# Altium PCB Dashboard PCB.PcbDoc
Units mm, origin at the board's own origin, x right, y up, seen from the top; angles counter-clockwise.
Board outline 53.83 x 47.9 mm, 2 copper layers (Top Layer, Bottom Layer); 22 components, 23 nets, 60 pads, 12 vias.
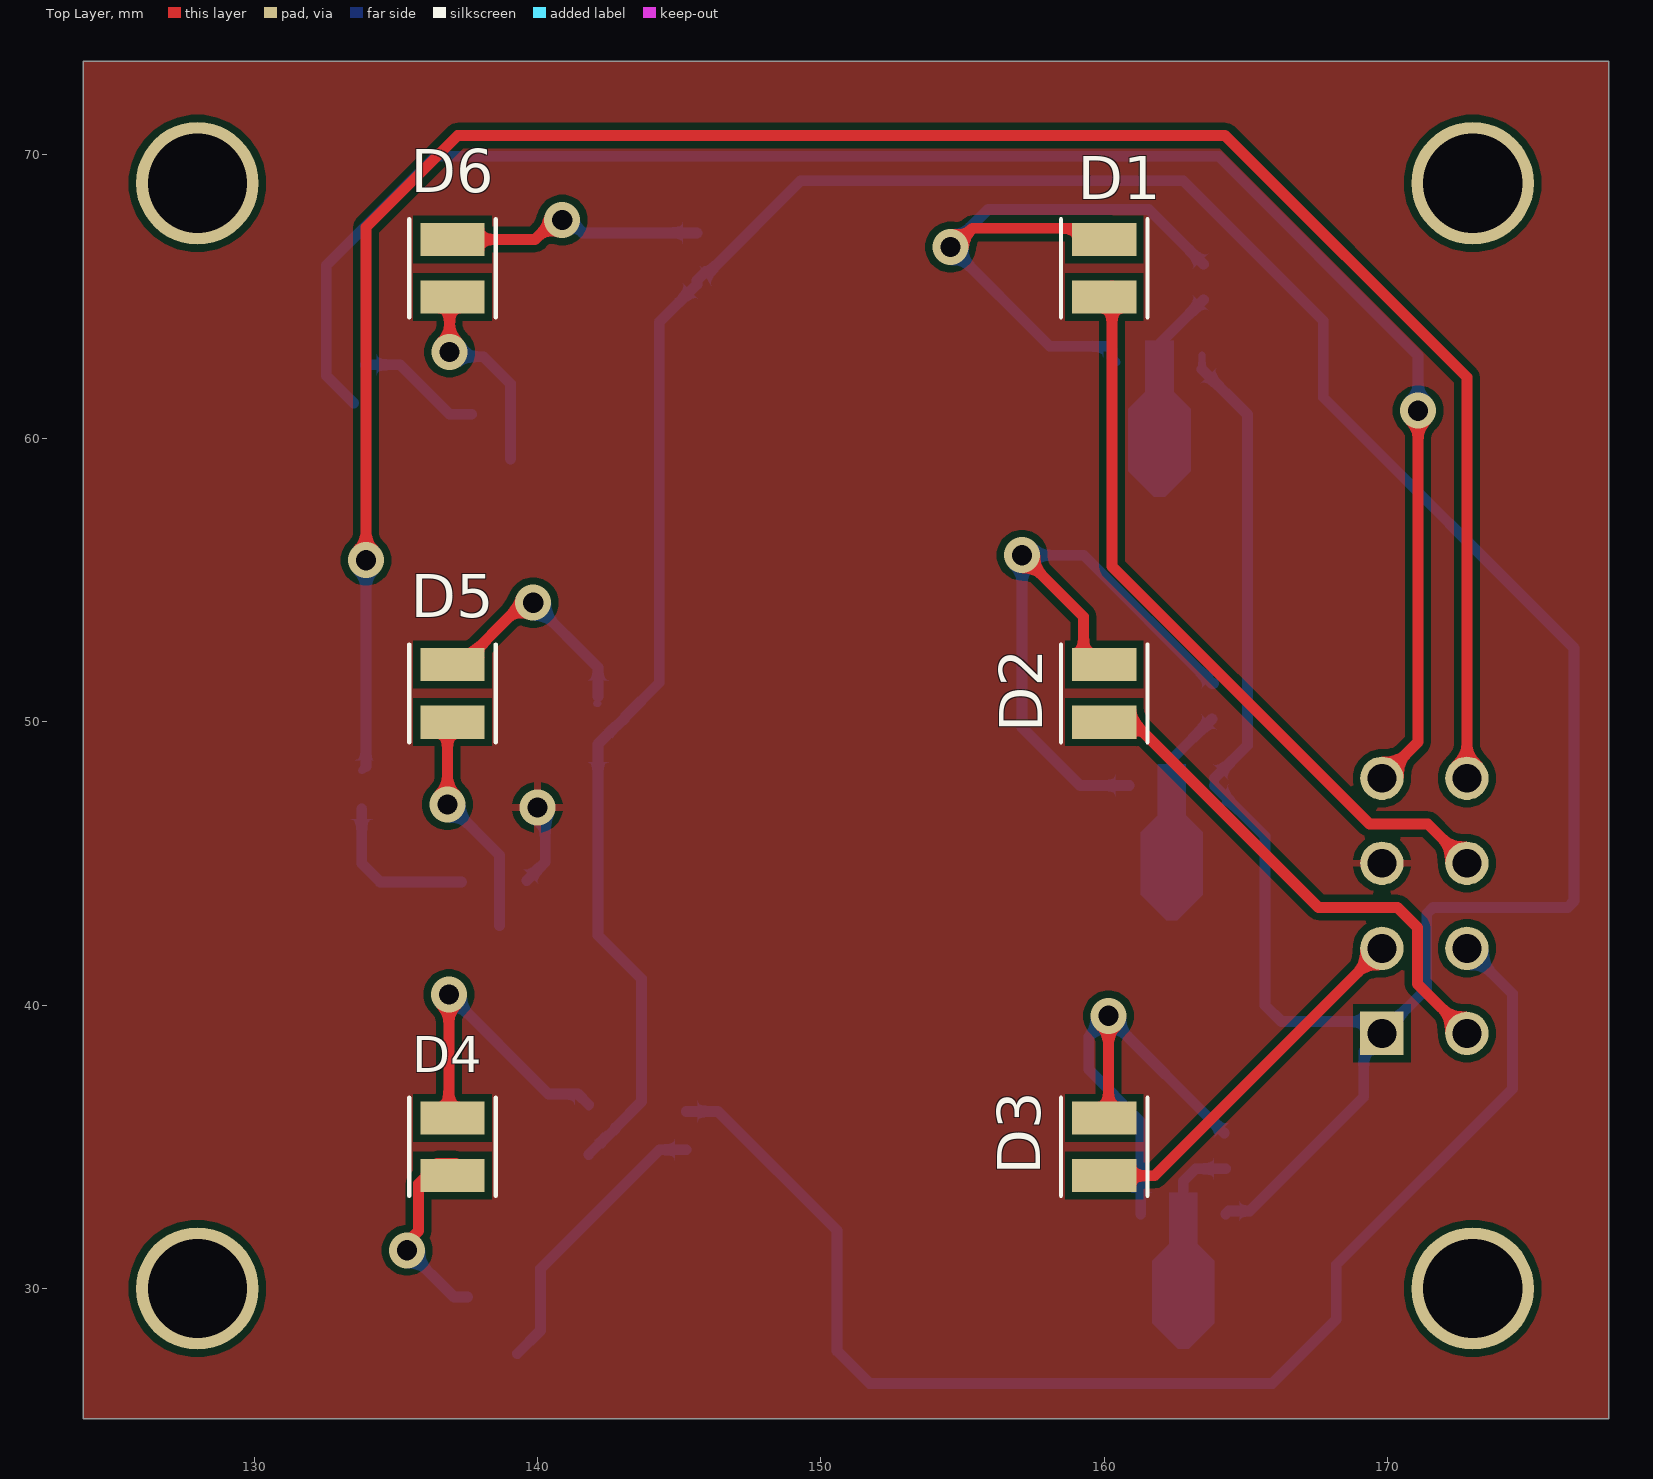
[diagram p0: Top Layer view]
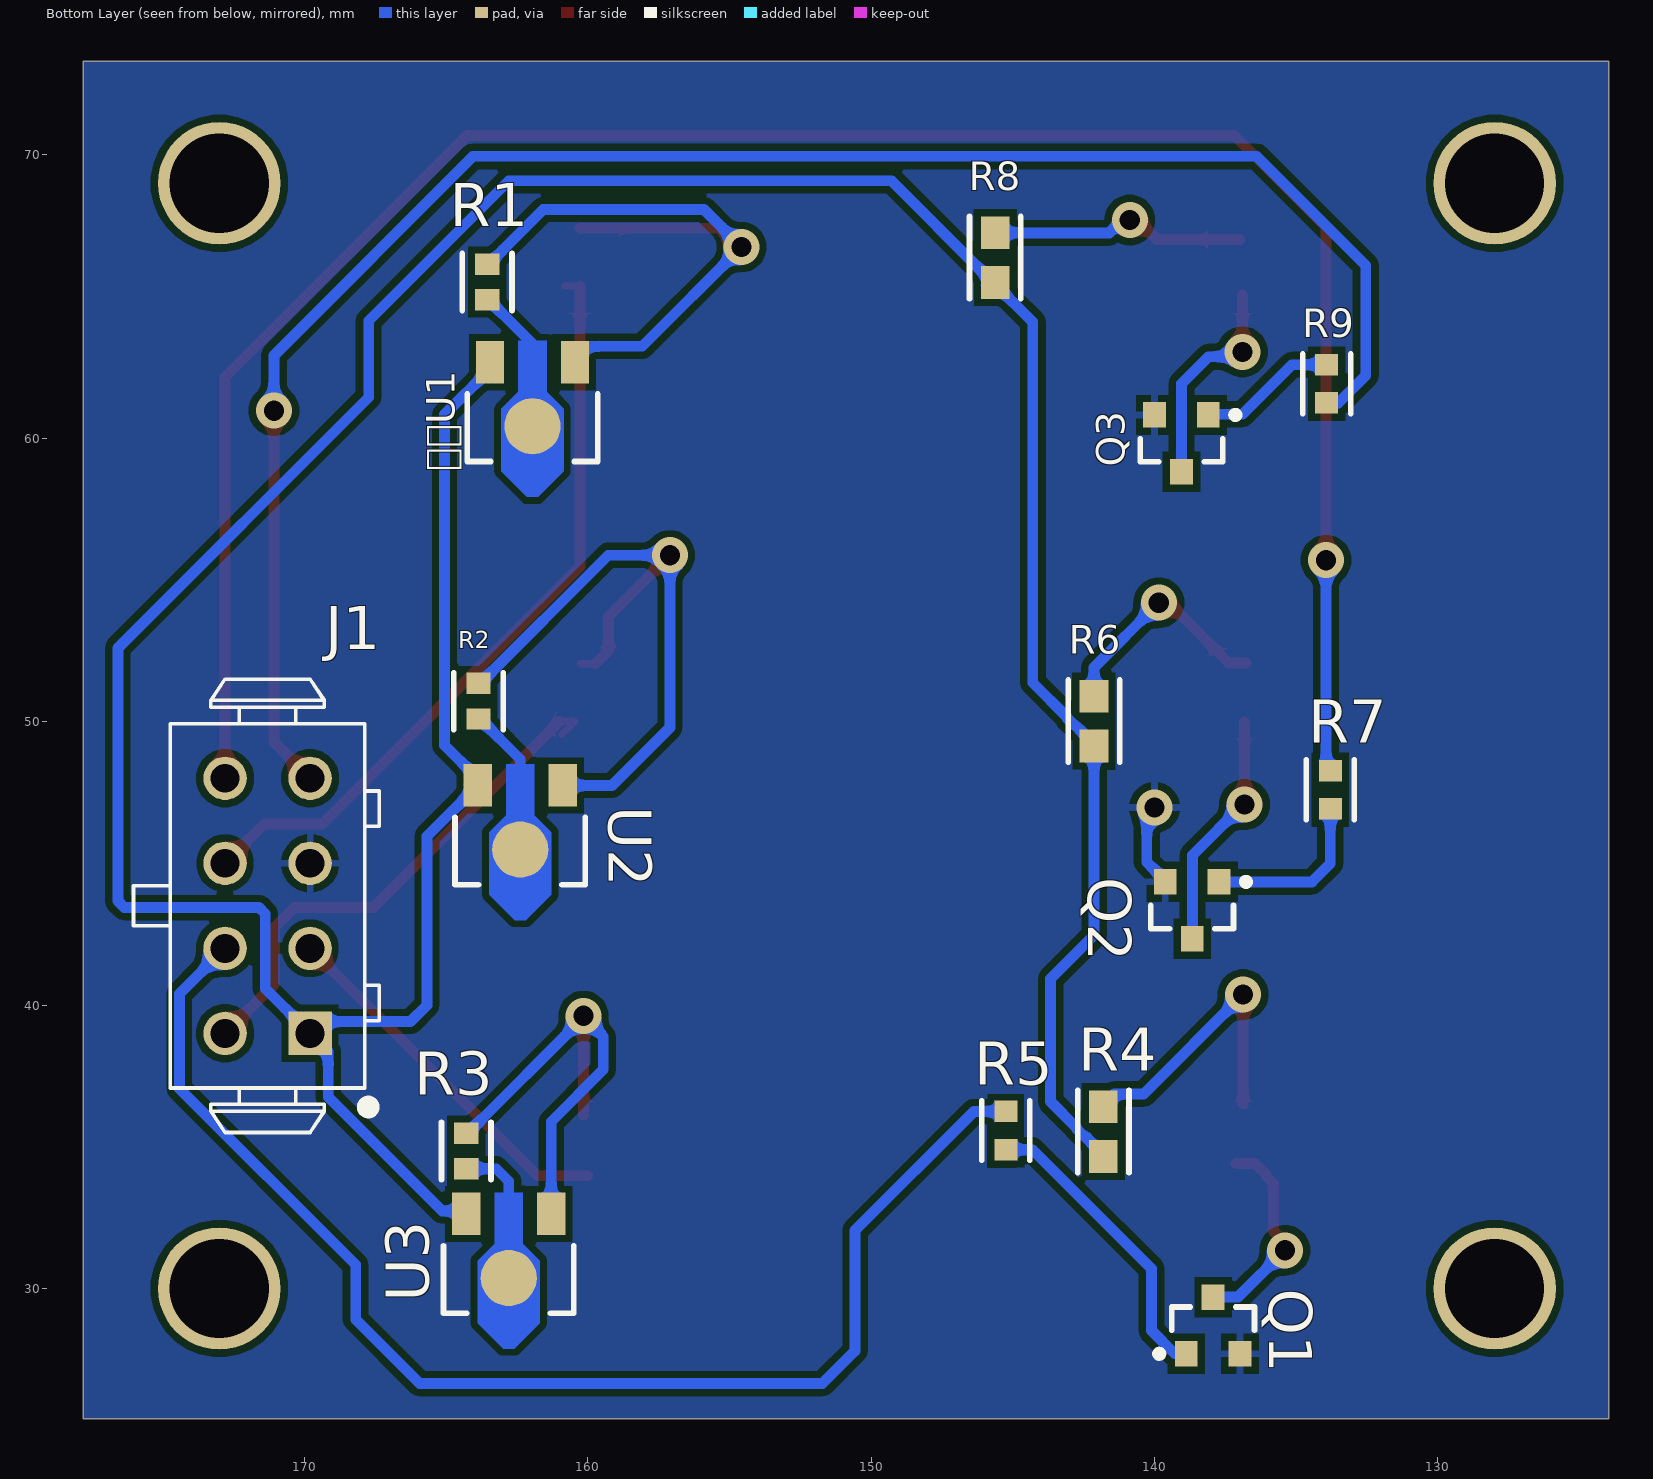
[diagram p1: Bottom Layer view, seen from below]
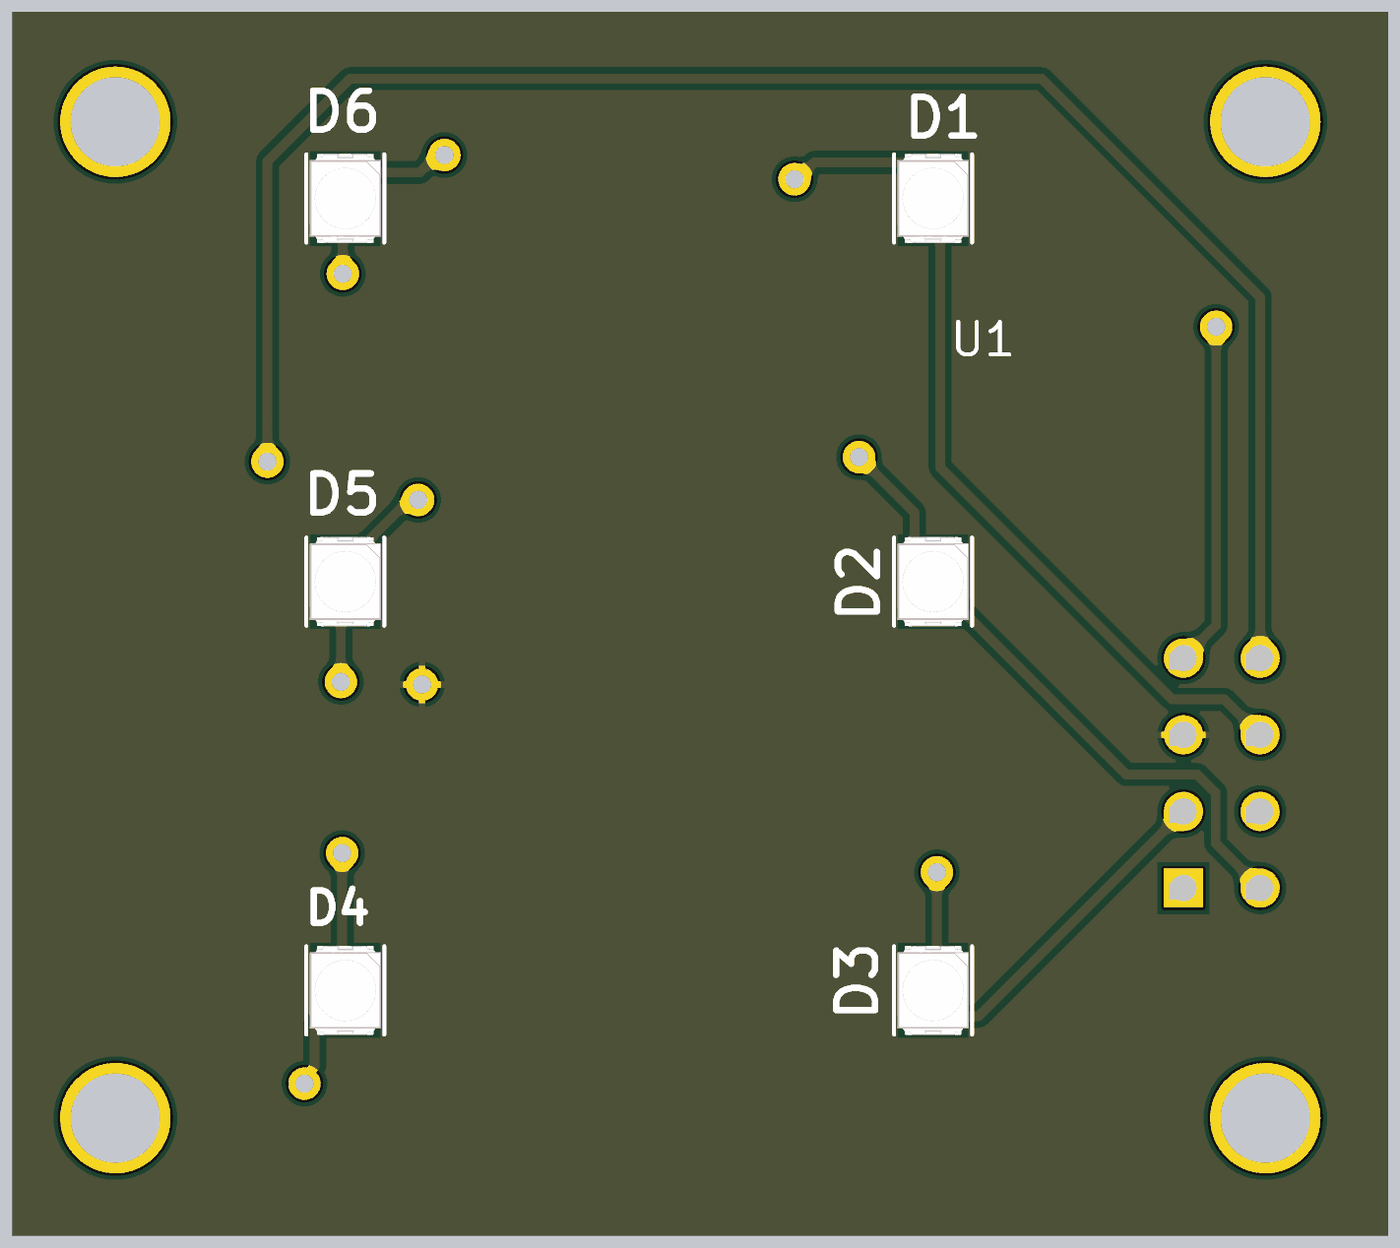
[diagram p2: 3D render of the assembled board from above, using the file's embedded part models]
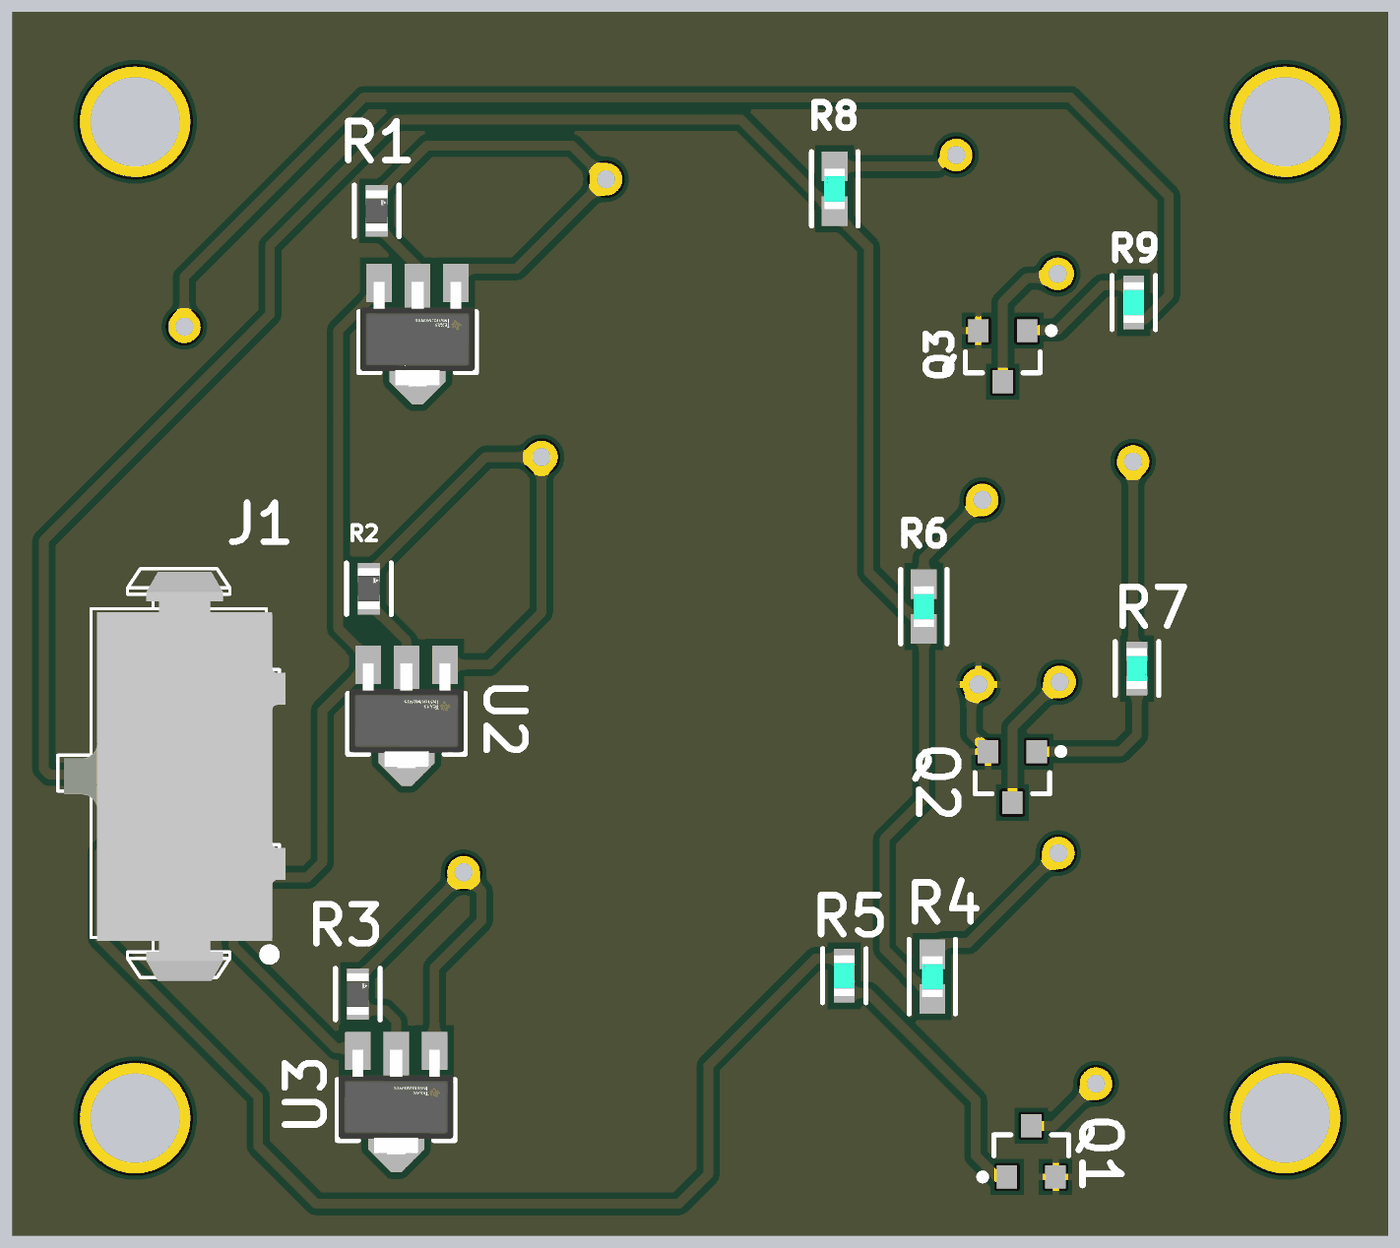
[diagram p3: 3D render of the assembled board from below, using the file's embedded part models]

## Layer stack, top to bottom
Top Solder: solder mask 0.0102, Solder Resist, Dk 3.5
Top Layer: signal copper 0.0356
Dielectric 1: dielectric 0.32, FR-4, Dk 4.8
Bottom Layer: signal copper 0.0356
Bottom Solder: solder mask 0.0102, Solder Resist, Dk 3.5

## Board outline
123.975,25.4 177.8,25.4 177.8,73.304 123.975,73.304

## Design rules (kind name [scope] priority, off if disabled: settings)
Clearance [All] p1: gap=0.254 ignorepadtopadclearanceinfootprint=FALSE except(0: Arc-Hole Track-Hole SMDPad-Hole THPad-Hole Via-Hole Fill-Hole Poly-Hole Region-Hole Text-Hole)
HoleSize [All] p1 off: absolutevalues=TRUE maxlimit=2.54 minlimit=0.025 maxpercent=80.000 minpercent=20.000
PolygonConnect [All] p1: connectstyle=Relief reliefconductorwidth=0.254 reliefentries=4 polygonreliefangle="90 Angle" airgapwidth=0.254
RoutingVias [All] p1: holewidth=0.711 width=1.27 viastyle="Through Hole" minholewidth=0.711 minwidth=1.27 maxholewidth=0.711 maxwidth=1.27
SolderMaskExpansion [All] p1: expansion=0.102 istentingtop=FALSE
Width [All] p1 off: maxlimit=0.254 minlimit=0.254 preferedwidth=0.254
29 further rules are at their usual default settings.

## Components (designator, comment, footprint, x,y, rotation, side; value= is the part's Value field where it differs from the comment)
U1 "LM317LCPK" FP-PK0003A-MFG 161.95,60.484 r0 bottom (schematic designator U1)
D1 "SML-Z14V4TT86" LED_SMLZ14_ROM 160,66 r90 top
D2 "SML-Z14V4TT86" LED_SMLZ14_ROM 160,51 r90 top
D3 "SML-Z14V4TT86" LED_SMLZ14_ROM 160,35 r90 top
D4 "SML-Z14D4TT86" LED_SMLZ14_ROM 137,35 r90 top
D5 "SML-Z14D4TT86" LED_SMLZ14_ROM 137,51 r90 top
D6 "SML-Z14D4TT86" LED_SMLZ14_ROM 137,66 r90 top
J1 "3-794630-8" CONN_3-794630-8 171.296,43.506 r90 bottom
Q1 "MMBT2222ALT1" ONSC-SOT-23-3-318-08_V 137.935,28.697 r90 bottom
Q2 "MMBT2222ALT1" ONSC-SOT-23-3-318-08_V 138.675,43.35 r270 bottom
Q3 "MMBT2222ALT1" ONSC-SOT-23-3-318-08_V 139.05,59.825 r270 bottom
R1 "CRCW060318R0FKEAHP" FP-CRCW0603-HPe3-IPC_C 163.551,65.515 r90 bottom
R2 "CRCW060318R0FKEAHP" FP-CRCW0603-HPe3-IPC_C 163.855,50.724 r90 bottom
R3 "CRCW060318R0FKEAHP" FP-CRCW0603-HPe3-IPC_C 164.287,34.857 r90 bottom
R4 "RN731JTTD5420D10" FP-RN731J-IPC_A 141.809,35.539 r90 bottom
R5 "RN731JTTD1930B25" FP-RN731J-IPC_C 145.25,35.575 r270 bottom
R6 "RN731JTTD5420D10" FP-RN731J-IPC_A 142.138,50.021 r90 bottom
R7 "RN731JTTD1930B25" FP-RN731J-IPC_C 133.8,47.6 r270 bottom
R8 "RN731JTTD5420D10" FP-RN731J-IPC_A 145.625,66.375 r90 bottom
R9 "RN731JTTD1930B25" FP-RN731J-IPC_C 133.925,61.925 r90 bottom
U2 "LM317LCPK" FP-PK0003A-MFG 162.382,45.549 r0 bottom
U3 "LM317LCPK" FP-PK0003A-MFG 162.789,30.429 r0 bottom

## Footprints (in the part's own frame and the unit in brackets; to place one, negate y for a bottom-side part, rotate by r counter-clockwise, add the part's x,y. Pads: shape width x height; smd on the part's side, far side on the other; paste and mask are expansions set on the pad)
CONN_3-794630-8 [mm]
  rect 1.53x1.53 hole 1.02: 1(-4.5,-1.5)
  round 1.53 hole 1.02: 2(-4.5,1.5) 3(-1.5,-1.5) 4(-1.5,1.5) 5(1.5,-1.5) 6(1.5,1.5) 7(4.5,-1.5) 8(4.5,1.5)
  silkscreen extent -8,-3.94 8,4.73, body extent -8.13,-4.17 7.87,4.5, height 9.2
FP-CRCW0603-HPe3-IPC_C [mm]
  rect 0.758x0.862 smd paste+0 mask+0: 1(-0.627,0) 2(0.627,0)
  silkscreen extent -1.01,-0.87 1.01,0.87, body extent -0.8,-0.43 0.8,0.43, height 0.55
FP-PK0003A-MFG [mm]
  rect 1x1.5 smd paste+0 mask+0: 1(-1.5,-2.203) 3(1.5,-2.203)
  round 1.98 smd paste+0 mask+0: 2(0,0.058)
  Top Layer region: -0.5,-2.953 -0.5,-1.152 -1.1,-0.553 -1.1,1.647 -0.2,2.548 0.2,2.548 1.1,1.647 1.1,-0.553 0.5,-1.152 0.5,-2.953
  silkscreen extent -2.3,-1.08 2.3,1.3, body extent -2.25,-2.25 2.25,1.85, height 1.6
FP-RN731J-IPC_A [mm]
  rect 1.156x1.012 smd paste+0 mask+0: 1(-0.875,0) 2(0.875,0)
  silkscreen extent -1.45,-0.91 1.45,0.91, body extent -0.8,-0.4 0.8,0.4, height 0.55
FP-RN731J-IPC_C [mm]
  rect 0.756x0.812 smd paste+0 mask+0: 1(-0.675,0) 2(0.675,0)
  silkscreen extent -1.05,-0.85 1.05,0.85, body extent -0.8,-0.4 0.8,0.4, height 0.55
LED_SMLZ14_ROM [mil]
  rect 46x89 smd paste+0 mask+0: 1(-40,0) 2(40,0)
  silkscreen extent -68,-60 68,60, body extent -69,-55 69,55, height 65
ONSC-SOT-23-3-318-08_V [mm] "SOT23, 3-Leads, Body 2.92x1.3mm, Pitch 0.95mm"
  rect 0.9x0.8 smd: 1(-1,0.95) 2(-1,-0.95) 3(1,0)
  silkscreen extent -1.12,-1.46 0.65,2.03, body extent -0.65,-1.46 0.65,1.46, height 1.11

## Part data
U1 U2 U3: library part CMP-04917-000008-1, "IC REG LIN POS ADJ 100MA SOT89-3", Dropout Voltage=2000mV, Manufacturer="Texas Instruments", Max Junction Temp=+125°C, Max Supply Voltage=35V, Min Supply Voltage=5V, Nominal Supply Current=50uA, Output Current=100mA, Output Voltage=1.25-32V, Package=PK0003A, Temperature="0°C to +125°C", Temperature Range Low=0°C, Accuracy Percentage=4%, Automotive=No, Category=IC, ComponentLink2Description=Datasheet, ComponentLink2URL=http://www.ti.com/lit/ds/symlink/lm317l.pdf, Device Class L1="Integrated Circuits (ICs)", Device Class L2="Power Management ICs", Device Class L3="Voltage Regulators - Linear", Digikey Description="IC REG LIN POS ADJ 100MA SOT89-3", Footprint Url=http://www.ti.com/lit/ml/pptd070/pptd070.pdf, Height=1.6mm, Lead Free=Yes, Manufacturer Part Number=LM317LCPK, Mouser Description="3/8 Pin 100mA Adjustable Positive egulator 3-SOT-89 0 to 125", Number of Outputs=1, Octopart=https://octopart.com/lm317lcpk-texas+instruments-7099493, Output Type=AdjustableProgrammable, RoHS=TRUE, Temperature Range High=+125°C
D1 D2 D3: "Red 630nm LED Indication - Discrete 2V 2-PLCC", Mfr_Name="ROHM Semiconductor", Copyright="Copyright (C) 2022 Ultra Librarian. All rights reserved.", Digi-Key_Part_Number_1=846-1046-1-ND, Digi-Key_Part_Number_2=846-1046-2-ND, Digi-Key_Part_Number_3=846-1046-6-ND, Manufacturer_Part_Number=SML-Z14V4TT86, RefDes=RefDes, Type=DEV
D4 D5 D6: "LED ORANGE CLEAR 2PLCC SMD", Mfr_Name="ROHM Semiconductor", Copyright="Copyright (C) 2022 Ultra Librarian. All rights reserved.", Digi-Key_Part_Number_1=846-1041-1-ND, Digi-Key_Part_Number_2=846-1041-2-ND, Digi-Key_Part_Number_3=846-1041-6-ND, Manufacturer_Part_Number=SML-Z14D4TT86, RefDes=RefDes, Type=DEV
J1: "Wire-To-Board Connector, Vertical, Micro MATE-N-LOK Series, Through Hole, Header, 8, 3 mm", Package=None, Availability=Unavailable, MF="{'manufacturer': 'TE Connectivity'}", MP=3-794630-8, Price=None
Q1 Q2 Q3: library part CMP-1048-00593-1, "General Purpose Transistor, NPN Silicon, 3-Pin SOT-23, Tape and Reel", Manufacturer="On Semiconductor", ComponentLink1Description="Manufacturer URL", ComponentLink1URL=http://www.onsemi.com/, ComponentLink2Description=Datasheet, ComponentLink2URL=http://www.onsemi.cn/pub_link/Collateral/MMBT2222LT1-D.PDF, ComponentLink3Description="Package Specification", ComponentLink3URL=http://www.onsemi.cn/pub_link/Collateral/318-08.PDF, DatasheetVersion="Rev. 10", fT Min (MHz)=300, IC Continuous (A)=0.6, Mounting Technology="Surface Mount", PackageDescription="3-Pin Small Outline Transistor, Body 2.92 x 1.3 mm, Pitch 0.95 mm", PackageReference=SOT-23-3-318-08, PackageVersion="Rev. AP, 11/2009", Packing="Tape and Reel", PartNumber=MMBT2222ALT1, Polarity=NPN, RoHS=FALSE
R1 R2 R3: library part CMP-02407-009286-1, "RES Thick Film, 18Ω, 1%, 0.33W, 100ppm/°C, 0603", Case Code (Imperial)=0603, Case Code (Metric)=1608, Max Operating Temperature=155°C, Max Power Dissipation=250mW, Min Operating Temperature=-55°C, Package Quantity=5000, Resistance=18R, Temperature Coefficient=100ppm/°C, Tolerance=1%, Voltage Rating=75V, Case/Package=0603, Composition="Thick Film", Contact Plating=Tin, Depth=0.85mm, Features="Automotive AEC-Q200", Height=0.022inch, Lead Free="Lead Free", Length=1.6mm, Military Standard=Not, Mount="Surface Mount", Number of Terminations=2, Packaging="Tape and Reel", Power Rating=250mW, Termination=Wraparound, Voltage Rating (DC)=75V, Width=0.033inch
R4 R6 R8: library part CMP-04015-051464-1, "542Ω ±0.5% 0.063W, 1/16W Chip Resistor 0603 (1608 Metric) Moisture Resistant Thin Film", Case Code (Imperial)=0603, Case Code (Metric)=1608, Max Operating Temperature=125°C, Min Operating Temperature=-55°C, Power Rating=63mW, Resistance=542R, Temperature Coefficient=10ppm/°C, Tolerance=0.5%, Voltage Rating=50V, Case/Package=0603, Composition="Thin Film", Height=0.45mm, Length=1.6mm, Packaging="Tape and Reel", Termination=SMD/SMT, Weight=7.1E-05oz, Width=0.8mm
R5 R7 R9: library part CMP-04015-086043-1, "193Ω ±0.1% 0.063W, 1/16W Chip Resistor 0603 (1608 Metric) Moisture Resistant Thin Film", Case Code (Imperial)=0603, Case Code (Metric)=1608, Max Operating Temperature=125°C, Min Operating Temperature=-55°C, Power Rating=63mW, Resistance=193R, Resistor Type="Thin Film", Temperature Coefficient=25ppm/°C, Tolerance=0.1%, Voltage Rating=50V, Case/Package=0603, Height=0.45mm, Length=1.6mm, Packaging="Tape and Reel", RoHS Compliant=Yes, Series=RN73, Termination=SMD/SMT, Width=0.8mm

## Free pads (board coordinates)
  round 4.318 hole 3.5: 1(128,30) 1(128,69) 1(173,30) 1(173,69)

## Via types
v1: diameter 1.27, hole 0.711, Top Layer to Bottom Layer, 12 vias

## Nets (pads, with @x,y where several pads share a name; then routed paths per layer and width w, separated by ;. In a path a pad name is that pad's centre, name@x,y a point inside that pad or via, vN(x,y) a via of type N, cw(c..) or ccw(c..) an arc to the next point about the centre after c; other vN are vias at no path point)
AMS_GND: D2.1 J1.2 | length 18.7
  Top Layer w0.254: D2.1@160.909,49.555 160.452,50.013 D2.1@160.998,50.013
  Top Layer w0.381: D2.1@160.998,50.013 167.561,43.45 170.35,43.45 171.057,42.743 171.057,40.745 J1.2
BSPD_GND: D1.1 J1.6 | length 27.3
  Top Layer w0.254: D1.1@160.274,65.38 D1.1@160.82,65.38
  Top Layer w0.381: D1.1@160.274,65.38 160.274,55.476 169.359,46.391 171.411,46.391 J1.6
IMD_GND: D3.1 J1.3 | length 13.1
  Top Layer w0.381: D3.1 161.774,33.984 J1.3
NetU1_1: U1.1 D1.2 R1.2 | length 24
  Top Layer w0.254: v1(154.575,66.75) v1@154.689,66.75
  Top Layer w0.381: v1@154.689,66.75 155.35,67.412 D1.2@160.274,67.412
  Bottom Layer w0.254: U1.1@160.274,62.863 U1.1 ; R1.2@163.499,66.142 R1.2
  Bottom Layer w0.381: U1.1@160.274,62.863 160.274,63.113 160.141,63.246 158.079,63.246 v1(154.575,66.75) 155.897,68.072 161.568,68.072 R1.2@163.499,66.142
NetU1_2: U1.2 R1.1 | length 5.2
  Bottom Layer w0.254: R1.1@163.499,64.888 R1.1
  Bottom Layer w0.381: U1.2 161.95,63.339 R1.1@163.499,64.888
NetD2_2: D2.2 R2.2 U2.1 | length 24.8
  Top Layer w0.254: D2.2@159.728,52.045 D2.2@160.274,52.045
  Top Layer w0.381: v1(157.1,55.875) 159.271,53.704 159.271,52.502 D2.2@159.728,52.045
  Bottom Layer w0.381: U2.1 159.148,47.752 157.1,49.8 v1(157.1,55.875) 159.279,55.875 163.803,51.351 R2.2
NetD3_2: D3.2 R3.2 U3.1 | length 17.4
  Top Layer w0.381: D3.2@160.15,36.125 v1(160.15,39.625)
  Bottom Layer w0.254: v1@160.15,39.588 v1(160.15,39.625) ; R3.2@164.235,35.484 R3.2
  Bottom Layer w0.381: U3.1 161.289,35.886 159.45,37.725 159.45,38.888 160.15,39.588 160.15,39.569 R3.2@164.235,35.484
NetD4_1: D4.1 Q1.3 | length 7
  Top Layer w0.254: v1(135.4,31.35) v1@135.4,31.625
  Top Layer w0.381: v1@135.4,31.625 135.801,32.026 135.801,32.445 135.801,33.701 136.06,33.96 136.06,34.023 136.454,34.417 D4.1@137.125,34.417
  Bottom Layer w0.381: v1(135.4,31.35) 137.053,29.697 137.535,29.697
NetD4_2: D4.2 R4.2 | length 10.6
  Top Layer w0.254: D4.2@136.804,36.449 D4.2@136.875,36.52
  Top Layer w0.381: D4.2@136.875,36.52 v1(136.875,40.375)
  Bottom Layer w0.254: R4.2 R4.2@141.809,36.486
  Bottom Layer w0.381: v1(136.875,40.375) 140.385,36.865 141.43,36.865 R4.2@141.809,36.486
NetD5_1: D5.1 Q2.3 | length 8
  Top Layer w0.254: D5.1@136.804,50.013 D5.1@136.825,49.992
  Top Layer w0.381: v1(136.825,47.075) D5.1@136.825,49.992
  Bottom Layer w0.381: v1(136.825,47.075) 136.875,47.075 138.663,45.287 138.663,42.813
NetD5_2: D5.2 R6.2 | length 8.3
  Top Layer w0.254: D5.2@136.775,52.074 D5.2@136.804,52.045
  Top Layer w0.381: D5.2@136.775,52.074 137.38,52.074 139.336,54.03 139.68,54.03 v1(139.85,54.2)
  Bottom Layer w0.254: R6.2@142.086,50.648 R6.2@142.138,50.648
  Bottom Layer w0.381: v1(139.85,54.2) 142.138,51.912 R6.2
NetD6_1: D6.1 Q3.3 | length 7.3
  Top Layer w0.381: v1(136.9,63.05) D6.1@136.9,65.059
  Bottom Layer w0.381: v1(136.9,63.05) 137.07,62.88 138.094,62.88 139.05,61.925 139.05,59.275
NetD6_2: D6.2 R8.2 | length 9.1
  Top Layer w0.254: v1@140.6,67.7 v1(140.875,67.7)
  Top Layer w0.381: D6.2 139.916,67.016 140.43,67.53 140.464,67.53 140.6,67.666 v1@140.6,67.7
  Bottom Layer w0.254: v1(140.875,67.7) v1@141.15,67.7
  Bottom Layer w0.381: v1@141.15,67.7 141.6,67.25 R8.2
NetJ1_4: J1.4 R5.1 | length 46.7
  Bottom Layer w0.254: R5.1 R5.1@145.278,36.25
  Bottom Layer w0.381: R5.1 146.375,36.25 150.575,32.05 150.575,27.8 151.725,26.65 165.925,26.65 168.187,28.912 168.187,30.837 174.4,37.05 174.4,39.526 174.4,40.402 J1.4
NetJ1_7: J1.7 R9.1 | length 63.7
  Top Layer w0.381: J1.7 171.075,49.285 v1(171.075,60.975)
  Bottom Layer w0.381: 133.519,61.249 132.55,62.218 132.55,63.046 132.55,66.1 136.4,69.95 164.05,69.95 171.075,62.925 v1(171.075,60.975)
NetJ1_8: J1.8 R7.1 | length 77.1
  Top Layer w0.381: v1(133.95,55.7) 133.95,67.45 137.187,70.687 164.263,70.687 172.796,62.154 J1.8
  Bottom Layer w0.254: R7.1 R7.1@133.95,48.425
  Bottom Layer w0.381: R7.1@133.95,48.425 v1(133.95,55.7)
NetQ1_1: Q1.1 R5.2 | length 10.2
  Bottom Layer w0.381: 139.285,27.697 140.109,28.521 140.109,30.698 144.31,34.9 R5.2
NetQ2_1: Q2.1 R7.2 | length 5.7
  Bottom Layer w0.381: R7.2 133.8,45 134.45,44.35 137.325,44.35
NetQ3_1: Q3.1 R9.2 | length 4.5
  Bottom Layer w0.381: R9.2 135.15,62.6 136.9,60.85 137.675,60.85
NetR2_1: R2.1 U2.2 | length 5.2
  Bottom Layer w0.254: R2.1@163.803,50.097 R2.1
  Bottom Layer w0.381: U2.2 162.382,48.676 R2.1@163.803,50.097
NetR3_1: R3.1 U3.2 | length 5.1
  Bottom Layer w0.381: U3.2 162.789,33.789 163.23,34.23 R3.1
VCC: U1.3 J1.1 R4.1 R6.1 R8.1 U2.3 U3.3 | length 132.3
  Bottom Layer w0.254: R4.1 R4.1@141.809,34.735 ; R6.1 R6.1@142.138,49.217 ; U1.3@163.45,62.437 U1.3 U1.3@163.45,62.937 ; U2.3 U2.3@163.882,48.002 ; J1.1@169.377,39.425 J1.1
  Bottom Layer w0.381: R4.1@141.809,34.735 142.465,35.392 142.499,35.392 142.76,35.652 142.76,35.686 143.675,36.601 143.675,40.929 142.138,42.465 R6.1 ; R6.1@142.138,49.217 142.795,49.874 142.829,49.874 143.089,50.134 143.089,50.168 144.3,51.379 144.3,64.103 145.625,65.428 R8.1 145.625,65.571 145.941,65.887 146.084,65.887 149.285,69.088 162.787,69.088 167.725,64.15 167.725,61.45 176.575,52.6 176.575,43.673 176.352,43.45 171.601,43.45 171.378,43.227 171.378,40.588 J1.1 169.158,38.368 169.158,36.758 165.137,32.737 164.394,32.737 U3.3 ; U1.3@163.45,62.437 165.05,60.837 165.05,49.169 U2.3@163.882,48.002 ; U2.3 165.675,45.959 165.675,40 166.25,39.425 J1.1@169.377,39.425
VCU_GND: J1.5 Q1.2 Q2.2 Q3.2 | length 3
  Bottom Layer w0.254: Q2.2 Q2.2@139.625,44.4 ; v1(140,46.975) 140,46.725 v1@140.275,46.45
  Bottom Layer w0.381: Q2.2@139.625,44.4 140.275,45.05 v1@140.275,46.45

## Polygon pours and split planes (outlines as drawn)
VCU_GND on Bottom Layer "VCU_GND_L02_P008" (solid, pour order 8): 123.975,73.3 177.8,73.3 177.8,25.4 123.975,25.4
VCU_GND on Top Layer "VCU_GND_L01_P009" (solid, pour order 9): 123.975,73.3 177.8,73.3 177.8,25.4 123.975,25.4